# Altium PCB PCB1.PcbDoc
Units mm, origin at the board's own origin, x right, y up, seen from the top; angles counter-clockwise.
Board outline 38.7 x 97.4 mm, 2 copper layers (Top Layer, Bottom Layer); 31 components, 22 nets, 85 pads, 0 vias.
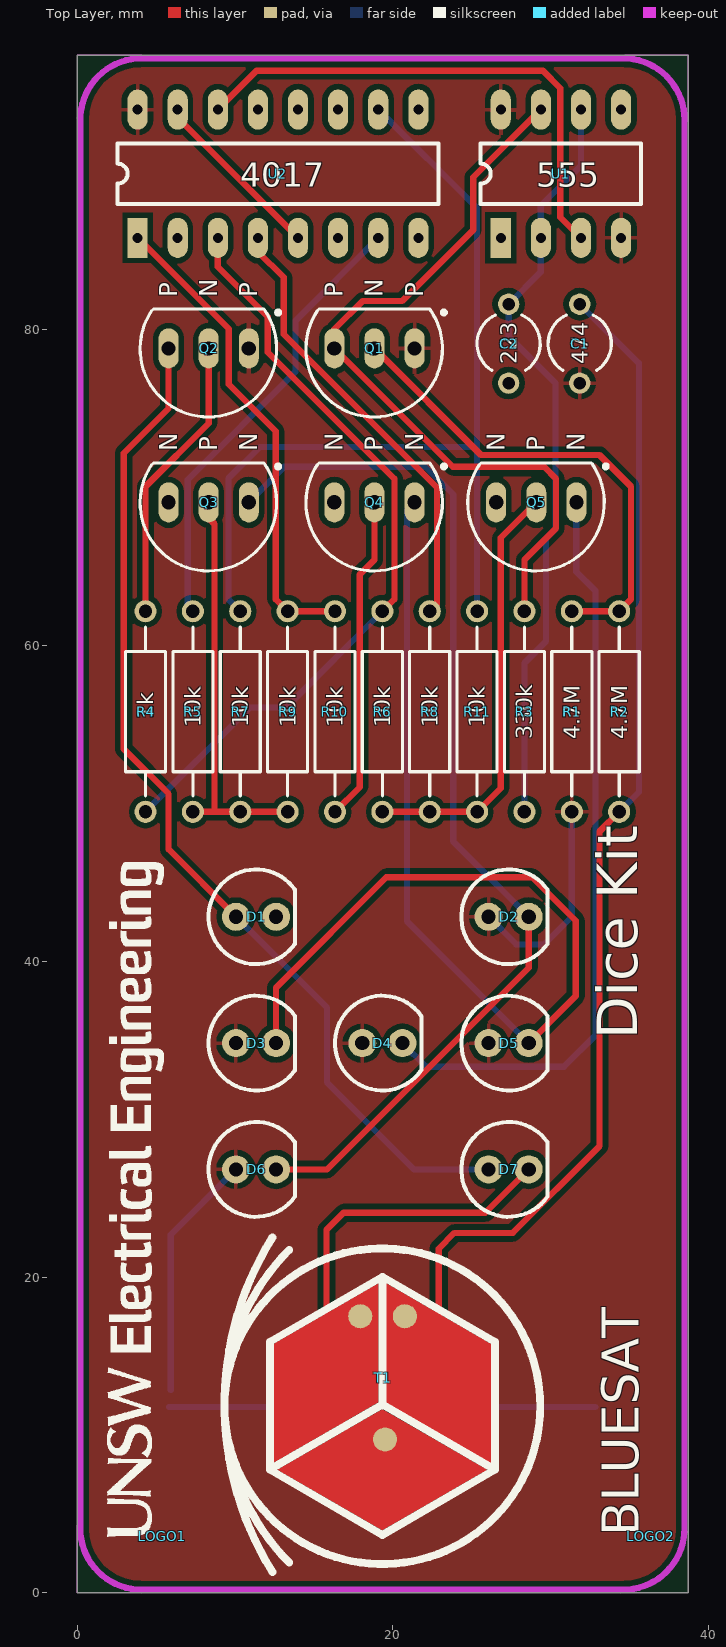
[diagram p0: Top Layer view]
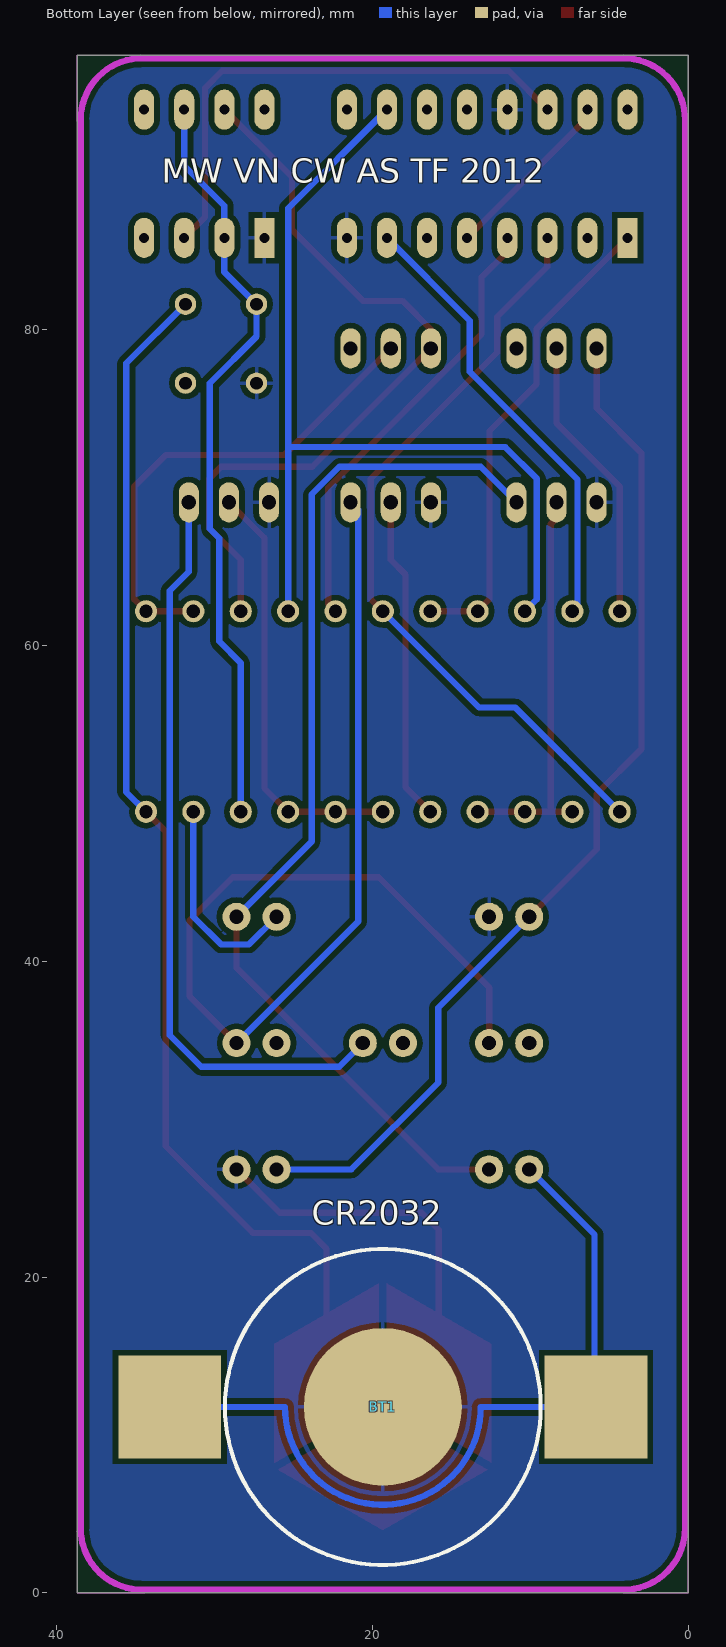
[diagram p1: Bottom Layer view, seen from below]

## Layer stack, top to bottom
Top Layer: signal copper 0.0356
Dielectric: dielectric 0.32, FR-4, Dk 4.8
Bottom Layer: signal copper 0.0356

## Board outline
0,0 0,97.4 38.7,97.4 38.7,0

## Design rules (kind name [scope] priority, off if disabled: settings)
AssemblyTestPointUsage [All] p1 off:
AssemblyTestpoint [All] p1 off: testpointundercomponent=TRUE minsize=1.016 maxsize=2.54 preferedsize=1.524 minholesize=0 maxholesize=1.016 preferedholesize=0.813 testpointgrid=0.025 usegrid=TRUE gridtolerance=0 allowsidetop=TRUE allowsidebottom=TRUE
Clearance [All] p1: gap=0.35
FabricationTestPointUsage [All] p1 off: valid=0 allowmultiple=FALSE
FabricationTestpoint [All] p1 off: side=3 testpointundercomponent=TRUE minsize=1.016 maxsize=2.54 preferedsize=1.524 minholesize=0 maxholesize=1.016 preferedholesize=0.813 testpointgrid=0.025 allowsidetop=TRUE allowsidebottom=TRUE usegrid=TRUE gridtolerance=0
PolygonConnect [All] p1: connectstyle=Relief reliefconductorwidth=0.254 reliefentries=4 polygonreliefangle="90 Angle"
RoutingVias [All] p1: holewidth=0.711 width=1.27 viastyle="Through Hole" minholewidth=0.711 minwidth=1.27 maxholewidth=0.711 maxwidth=1.27
SilkscreenOverComponentPads [All] p1: minsilkscreentomaskgap=0.029
SolderMaskExpansion [All] p1: expansion=0.102
Width [All] p1: maxlimit=0.4 minlimit=0.4 preferedwidth=0.4
23 further rules are at their usual default settings.

## Components (designator, comment, footprint, x,y, rotation, side; value= is the part's Value field where it differs from the comment)
BT1 "Battery" "CR2032 CLIP" 19.334,11.779 r0 bottom
C1 "Cap Pol2" CAPR5-4X5 31.834,79.123 r90 top
C2 "Cap" CAPR5-4X5 27.334,79.123 r90 top
D1 "LED" LED 11.334,42.823 r0 top
D2 "LED" LED 27.334,42.823 r0 top
D3 "LED" LED 11.334,34.823 r0 top
D4 "LED" LED 19.334,34.823 r0 top
D5 "LED" LED 27.334,34.823 r0 top
D6 "LED" LED 11.334,26.823 r0 top
D7 "LED" LED 27.334,26.823 r0 top
LOGO1 "UNSW_EE" UNSW_EE 5.4,3.6 r90 top
LOGO2 "BLUESAT_DICE" BLUESAT_DICE 36.334,3.573 r90 top
Q1 "BC557" PNP 18.834,78.823 r90 top
Q2 "BC557" PNP 8.334,78.823 r90 top
Q3 "BC547" NPN 8.334,69.073 r90 top
Q4 "BC547" NPN 18.834,69.073 r90 top
Q5 "BC547" NPN 29.084,69.073 r90 top
R1 "Res1" AXIAL-0.5 31.334,55.823 r270 top
R2 "Res1" AXIAL-0.5 34.334,55.823 r90 top
R3 "Res1" AXIAL-0.5 28.334,55.823 r90 top
R4 "Res1" AXIAL-0.5 4.334,55.823 r90 top
R5 "Res1" AXIAL-0.5 7.334,55.823 r270 top
R6 "Res1" AXIAL-0.5 19.334,55.823 r270 top
R7 "Res1" AXIAL-0.5 10.334,55.823 r270 top
R8 "Res1" AXIAL-0.5 22.334,55.823 r270 top
R9 "Res1" AXIAL-0.5 13.334,55.823 r270 top
R10 "Res1" AXIAL-0.5 16.334,55.823 r270 top
R11 "Res1" AXIAL-0.5 25.334,55.823 r270 top
T1 "TOUCH" PCBComponent_1 19.334,11.823 r0 top
U1 "555" 555 26.834,85.823 r90 top
U2 "CD4017" CD4017 3.834,85.823 r90 top

## Footprints (in the part's own frame and the unit in brackets; to place one, negate y for a bottom-side part, rotate by r counter-clockwise, add the part's x,y. Pads: shape width x height; smd on the part's side, far side on the other; paste and mask are expansions set on the pad)
555 [mil]
  rect 100x50 hole 25: 1(0,0)
  oval 100x50 hole 25: 2(0,-100) 3(0,-200) 4(0,-300) 5(320,-300) 6(320,-200) 7(320,-100) 8(320,0)
  silkscreen extent 85,-350 235,50
AXIAL-0.5 [mm] "Axial Device, Thru-Hole; 2 Leads; 0.5 in Pin Spacing"
  round 1.4 hole 0.85: 1(-6.35,0) 2(6.35,0)
  silkscreen extent -5.33,-1.27 5.33,1.27
BLUESAT_DICE [mm]
CAPR5-4X5 [mm] "Capacitor; 2 Leads"
  round 1.35 hole 0.8: 1(-2.5,0) 2(2.5,0)
  silkscreen extent -1.69,-2 1.82,2
CD4017 [mil]
  rect 100x50 hole 25: 1(0,0)
  oval 100x50 hole 25: 2(0,-100) 3(0,-200) 4(0,-300) 5(0,-400) 6(0,-500) 7(0,-600) 8(0,-700) 9(320,-700) 10(320,-600) 11(320,-500) 12(320,-400) 13(320,-300) 14(320,-200) 15(320,-100) 16(320,0)
  silkscreen extent 85,-750 235,50
"CR2032 CLIP" [mm]
  rect 6.5x6.5 smd: 1(-13.5,0) 1(13.5,0)
  round 10 smd: 2(0,0)
  silkscreen extent -10,-10 10,10
LED [mil]
  round 70 hole 35.43: 1(-50,0) 2(50,0)
  silkscreen extent -118,-118 97,118
NPN [mm]
  oval 2.54x1.27 hole 0.9: 1(0,-2.54) 2(0,0) 3(0,2.54)
  silkscreen extent -4.34,-4.52 2.5,4.34
PCBComponent_1 [mm]
  round 1.524 smd: 1(-1.4,5.7) 1(0.175,-2.1) 2(1.425,5.7)
  Top Layer region: -0.25,7.775 -0.25,0.25 -6.875,-3.575 -6.875,3.95
  Top Layer region: 0.25,7.775 6.875,3.95 6.875,-3.6 0.25,0.225
  Top Layer region: -6.65,-4.025 0,-0.175 6.65,-4.025 0,-7.85
  silkscreen extent -10,-10.5 10,10.7
PNP [mm]
  oval 2.54x1.27 hole 0.9: 1(0,-2.54) 2(0,0) 3(0,2.54)
  silkscreen extent -4.34,-4.52 2.5,4.34
UNSW_EE [mm]
  silkscreen extent -0.05,-0.09 42.66,3.47

## Part data
BT1: "Multicell Battery"
C1: "Polarized Capacitor (Axial)"
C2: "Capacitor"
D1 D2 D3 D4 D5 D6 D7: library part LED0, "Typical INFRARED GaAs LED"
LOGO1 LOGO2: library part LOGO
Q1 Q2: library part 2N3906, "PNP General Purpose Amplifier"
Q3 Q4 Q5: library part NPN, "NPN Bipolar Transistor"
R1 R2 R3 R4 R5 R6 R7 R8 R9 R10 R11: "Resistor"

## Nets (pads, with @x,y where several pads share a name; then routed paths per layer and width w, separated by ;. In a path a pad name is that pad's centre, name@x,y a point inside that pad or via, vN(x,y) a via of type N, cw(c..) or ccw(c..) an arc to the next point about the centre after c; other vN are vias at no path point)
DICE1: R4.1 R6.1 U2.3 | length 48.9
  Top Layer w0.4: U2.3 8.914,83.993 12.084,80.823 12.084,78.573 20.1,70.557 20.1,62.939 R6.1
  Bottom Layer w0.4: R4.1 10.934,56.073 13.234,56.073 R6.1
DICE2: U2.2
DICE3: R8.1 U2.4 | length 28.5
  Top Layer w0.4: U2.4 11.454,84.953 13.084,83.323 13.084,79.716 22.8,70 22.8,62.639 R8.1
DICE4: R5.1 U2.7 | length 28.8
  Bottom Layer w0.4: R5.1 7,62.507 7,70.5 13.834,77.334 13.834,80.583 U2.7
DICE5: R7.1 R11.1 U2.10 | length 59.6
  Bottom Layer w0.4: R7.1 9.584,62.923 9.584,70.584 11.573,72.573 25.223,72.573 ; U2.10 25.334,87.691 R11.1
DICE6: R9.1 R10.1 U2.1 | length 30.6
  Top Layer w0.4: U2.1 9.6,80.057 9.6,76.557 12.584,73.573 12.584,62.923 R9.1 R10.1
GND: BT1.2 C2.1 D1.2 D7.2 Q3.3 Q4.3 Q5.3 T1.1 U1.1 U2.8 U2.13 | length 26.2
  Top Layer w0.4: 15.8,14 15.8,23 16.873,24.073 25.854,24.073 D7.2 ; 15.9,11.6 17.9,9.6
NetC1_2: C1.2 R2.1 T1.2 | length 77
  Top Layer w0.4: 22.9,13.6 22.9,21.8 23.9,22.8 27.584,22.8 33.084,28.3 33.084,48.223 R2.1
  Bottom Layer w0.4: C1.2 35.584,77.873 35.584,50.723 R2.1
NetC2_2: C2.2 R3.1 U1.2 U1.6 | length 48.4
  Bottom Layer w0.4: R3.1 28.334,58.9 29.7,60.266 29.7,66.8 30.3,67.4 30.3,76.607 27.334,79.573 C2.2 29.374,83.663 U1.2 29.374,87.863 31.914,90.403 U1.6
NetD1_1: D1.1 D7.1 Q2.3 | length 65.5
  Top Layer w0.4: Q2.3 5.794,75.033 2.95,72.189 2.95,53.45 5.794,50.606 5.794,47.093 D1.1
  Bottom Layer w0.4: D1.1 15.834,37.053 15.834,32.323 21.334,26.823 D7.1
NetD2_2: D2.2 D6.2 Q3.1 | length 67.9
  Top Layer w0.4: D6.2 15.834,26.823 28.604,39.593 D2.2
  Bottom Layer w0.4: Q3.1 13.124,71.323 22.084,71.323 23.834,69.573 23.834,47.593 D2.2
NetD3_2: D3.2 D5.2 Q4.1 | length 73.2
  Top Layer w0.4: D3.2 12.604,38.343 19.584,45.323 28.834,45.323 31.584,42.573 31.584,37.803 D5.2
  Bottom Layer w0.4: Q4.1 20.9,68.599 20.9,42.527 D5.2
NetD4_2: D4.2 Q5.1 | length 47.9
  Bottom Layer w0.4: D4.2 22.104,33.323 30.834,33.323 32.834,35.323 32.834,63.466 31.624,64.676 Q5.1
NetQ1_2: Q1.2 R1.1 R2.2 | length 31.1
  Top Layer w0.4: Q1.2 25.584,72.073 33.084,72.073 35.084,70.073 35.084,62.923 R2.2 R1.1
NetQ1_3: Q1.3 R3.2 U1.7 | length 48.7
  Top Layer w0.4: R3.2 28.334,65.428 30.334,67.428 30.334,70.573 29.584,71.323 23.794,71.323 Q1.3 16.294,80.033 18.084,81.823 20.584,81.823 25.084,86.323 25.084,89.661 U1.7
NetQ2_2: Q2.2 R4.2 | length 18.3
  Top Layer w0.4: R4.2 4.334,70.073 8.334,74.073 Q2.2
NetQ3_2: Q3.2 R5.2 R7.2 R9.2 | length 25.8
  Top Layer w0.4: R5.2 8.7,49.473 ; Q3.2 8.334,68.066 8.7,67.7 8.7,49.473 ; R9.2 8.7,49.473
NetQ4_2: Q4.2 R10.2 | length 20.6
  Top Layer w0.4: R10.2 17.9,51.039 17.9,64.5 18.834,65.434 Q4.2
NetQ5_2: Q5.2 R6.2 R8.2 R11.2 | length 27.2
  Top Layer w0.4: R6.2 R8.2 R11.2 26.834,50.973 26.834,66.823 Q5.2
NetU1_3: U1.3 U2.14 | length 33.2
  Top Layer w0.4: U2.14 11.363,96.4 29.507,96.4 30.6,95.307 30.6,87.137 U1.3
NetU2_5: U2.5 U2.15 | length 10.8
  Top Layer w0.4: U2.15@6.374,93.443 U2.5
VCC: BT1.1 C1.1 D2.1 D3.1 D4.1 D5.1 D6.1 Q1.1 Q2.1 R1.2 U1.4 U1.8 U2.16 | length 63.1
  Bottom Layer w0.4: BT1.1@5.834,11.779 13.134,11.779 ccw(c19.334,11.779) 25.534,11.779 BT1.1@32.834,11.779 ; BT1.1@5.924,12.849 5.924,22.683 D6.1 ; D2.1 27.814,41.073 29.584,41.073 31.334,42.823 R1.2
pads on no net: U1.5 U2.6 U2.9 U2.11 U2.12

## Polygon pours and split planes (outlines as drawn)
VCC on Top Layer "Top Layer-No Net" (solid, pour order 2): 0.584,96.823 38.084,96.823 38.084,0.2 0.584,0.2
GND on Bottom Layer "Top Layer-No Net" (solid, pour order 6): 38.084,0.2 0.584,0.2 0.584,96.823 38.084,96.823

## Keep-outs
Keep-Out Layer:
  region: 34.4,0 36.2,0.6 37.7,1.6 38.3,3 38.7,3.9 38.7,0
  region: 0,4.3 0.3,3.3 0.9,1.8 1.9,0.8 3.2,0.2 4.1,0 0,0
  region: 34.7,97.4 35.8,97 37.3,96.2 38.3,94.8 38.6,93.4 38.7,93.2 38.7,97.4
  region: 0,93.4 0.6,94.9 1.6,96.3 3.2,97.1 4.1,97.4 0,97.4
  lines w0.4: 0.2,4.074 ccw(c4.089,4.089) 4.084,0.2 34.584,0.2 ccw(c34.584,4.089) 38.473,4.073 38.473,93.307 ccw(c34.584,93.307) 34.584,97.196 4.09,97.196 ccw(c4.09,93.307) 0.2,93.307 0.2,4.074

## Silkscreen, mask and mechanical layers (free items; w line width, h text height)
Top Overlay:
  text "4017" at 10.334,89.073 h1.52
  text "555" at 29.084,89.073 h1.52
  text "223" at 27.834,77.823 h1.02 r90
  text "474" at 32.334,77.823 h1.02 r90
  text "1k" at 4.834,55.323 h1.02 r90
  text "10k" at 7.834,54.823 h1.02 r90
  text "10k" at 10.834,54.823 h1.02 r90
  text "10k" at 13.834,54.823 h1.02 r90
  text "10k" at 16.834,54.823 h1.02 r90
  text "10k" at 19.834,54.823 h1.02 r90
  text "10k" at 22.834,54.823 h1.02 r90
  text "10k" at 25.834,54.823 h1.02 r90
  text "330k" at 28.834,54.073 h1.02 r90
  text "4.7M" at 31.834,54.073 h1.02 r90
  text "4.7M" at 34.834,54.073 h1.02 r90
Bottom Overlay:
  text "MW VN CW AS TF 2012" at 33.334,89.323 h1.52
  text "CR2032" at 23.834,23.323 h1.52

## Text inside footprints (layer, text, board x,y; h text height)
LOGO2: Top Overlay "BLUESAT" at 36.334,3.573 h4 r90; Top Overlay "Dice Kit" at 36.334,35.073 h4.4 r90
Q1: Top Overlay "P" at 21.914,82.073 h1.14 r90; Top Overlay "N" at 19.374,82.073 h1.14 r90; Top Overlay "P" at 16.834,82.073 h1.14 r90
Q2: Top Overlay "P" at 11.414,82.073 h1.14 r90; Top Overlay "N" at 8.874,82.073 h1.14 r90; Top Overlay "P" at 6.334,82.073 h1.14 r90
Q3: Top Overlay "N" at 11.414,72.323 h1.14 r90; Top Overlay "P" at 8.874,72.323 h1.14 r90; Top Overlay "N" at 6.334,72.323 h1.14 r90
Q4: Top Overlay "N" at 21.914,72.323 h1.14 r90; Top Overlay "P" at 19.374,72.323 h1.14 r90; Top Overlay "N" at 16.834,72.323 h1.14 r90
Q5: Top Overlay "N" at 32.164,72.323 h1.14 r90; Top Overlay "P" at 29.624,72.323 h1.14 r90; Top Overlay "N" at 27.084,72.323 h1.14 r90